# EAGLE board IJ_1U24HP_panel (EAGLE 6.6.0)

Size 121.6 x 39.65 mm. Coordinates in mm from the lower left corner, seen from the top.
Outline: 121.6,39.65 0,39.65 0,0 121.6,0 121.6,39.65
Copper layers (1*16): Top 0.035mm / dielectric 1.5mm / Bottom 0.035mm
Design rules "PatternAgents_7mil": minimum track width 7mil, minimum drill 14mil, track to track 7mil, track to pad 7mil, pad to pad 7mil, via to via 7mil, smd to smd 7mil, copper to edge 7mil, drill to drill 7mil, minimum pad ring 12mil, minimum via ring 10mil, stop-mask expansion 4mil, vias tented up to drill 25mil, thermal gap 7mil
Holes 3.2 mm at 7.5,36.65 7.5,3 114.1,36.65 114.1,3 7,36.65 8,36.65 7,3 8,3 113.5,3 114.6,3 113.4,36.65 114.6,36.65

## Placement (x,y rotation side)
U$48  BY_CC_SA_TEXTTEXT  [BY_CC_SA_TEXT]  21.08,-7.62 0 top  (outside the outline)

## Library data of the parts
U$48 = PatternAgents-Logos

## Text on the board
tDocu: Tom Moxon